# Altium PCB vga2.PcbDoc
Units mm, origin at the board's own origin, x right, y up, seen from the top; angles counter-clockwise.
Board outline 35.87 x 32.67 mm, 2 copper layers (Top Layer, Bottom Layer); 2 components, 17 nets, 37 pads, 0 vias.
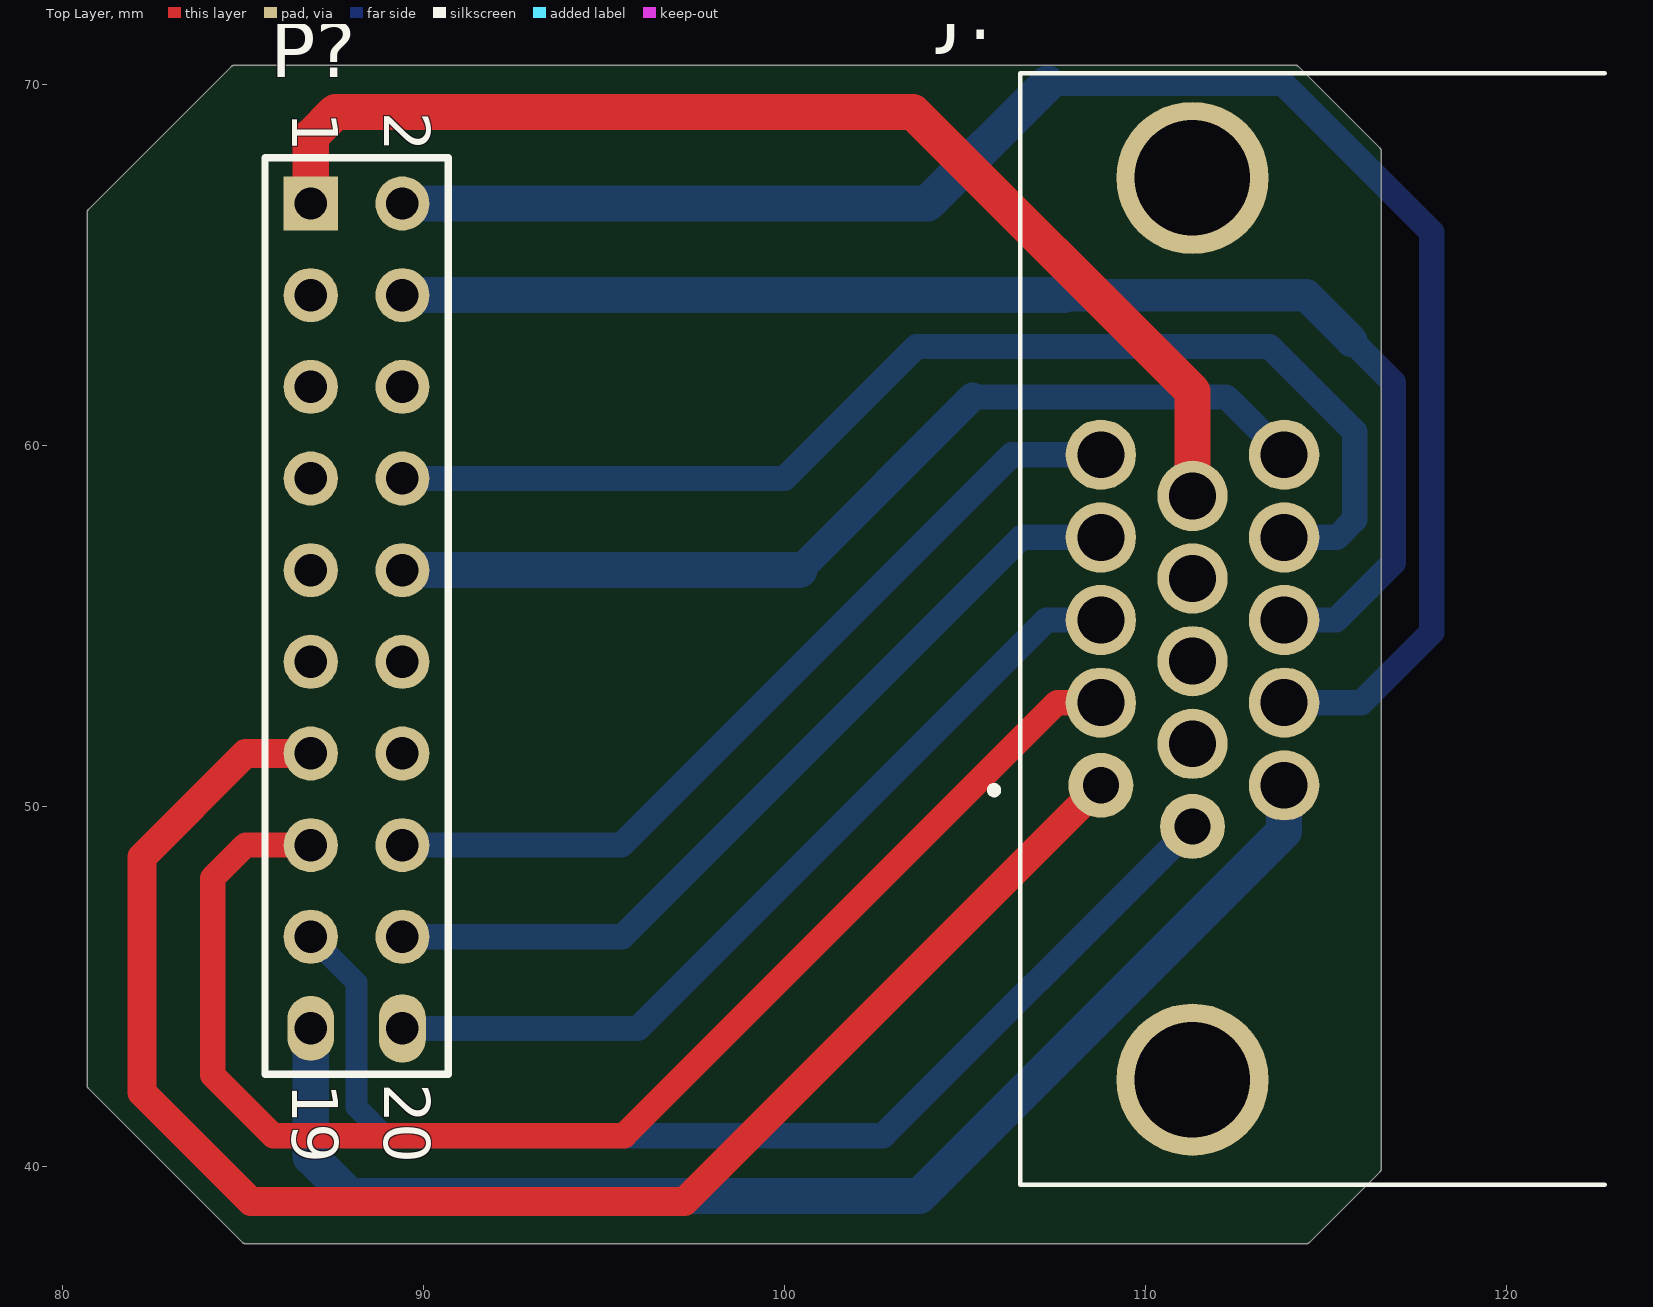
[diagram p0: Top Layer view]
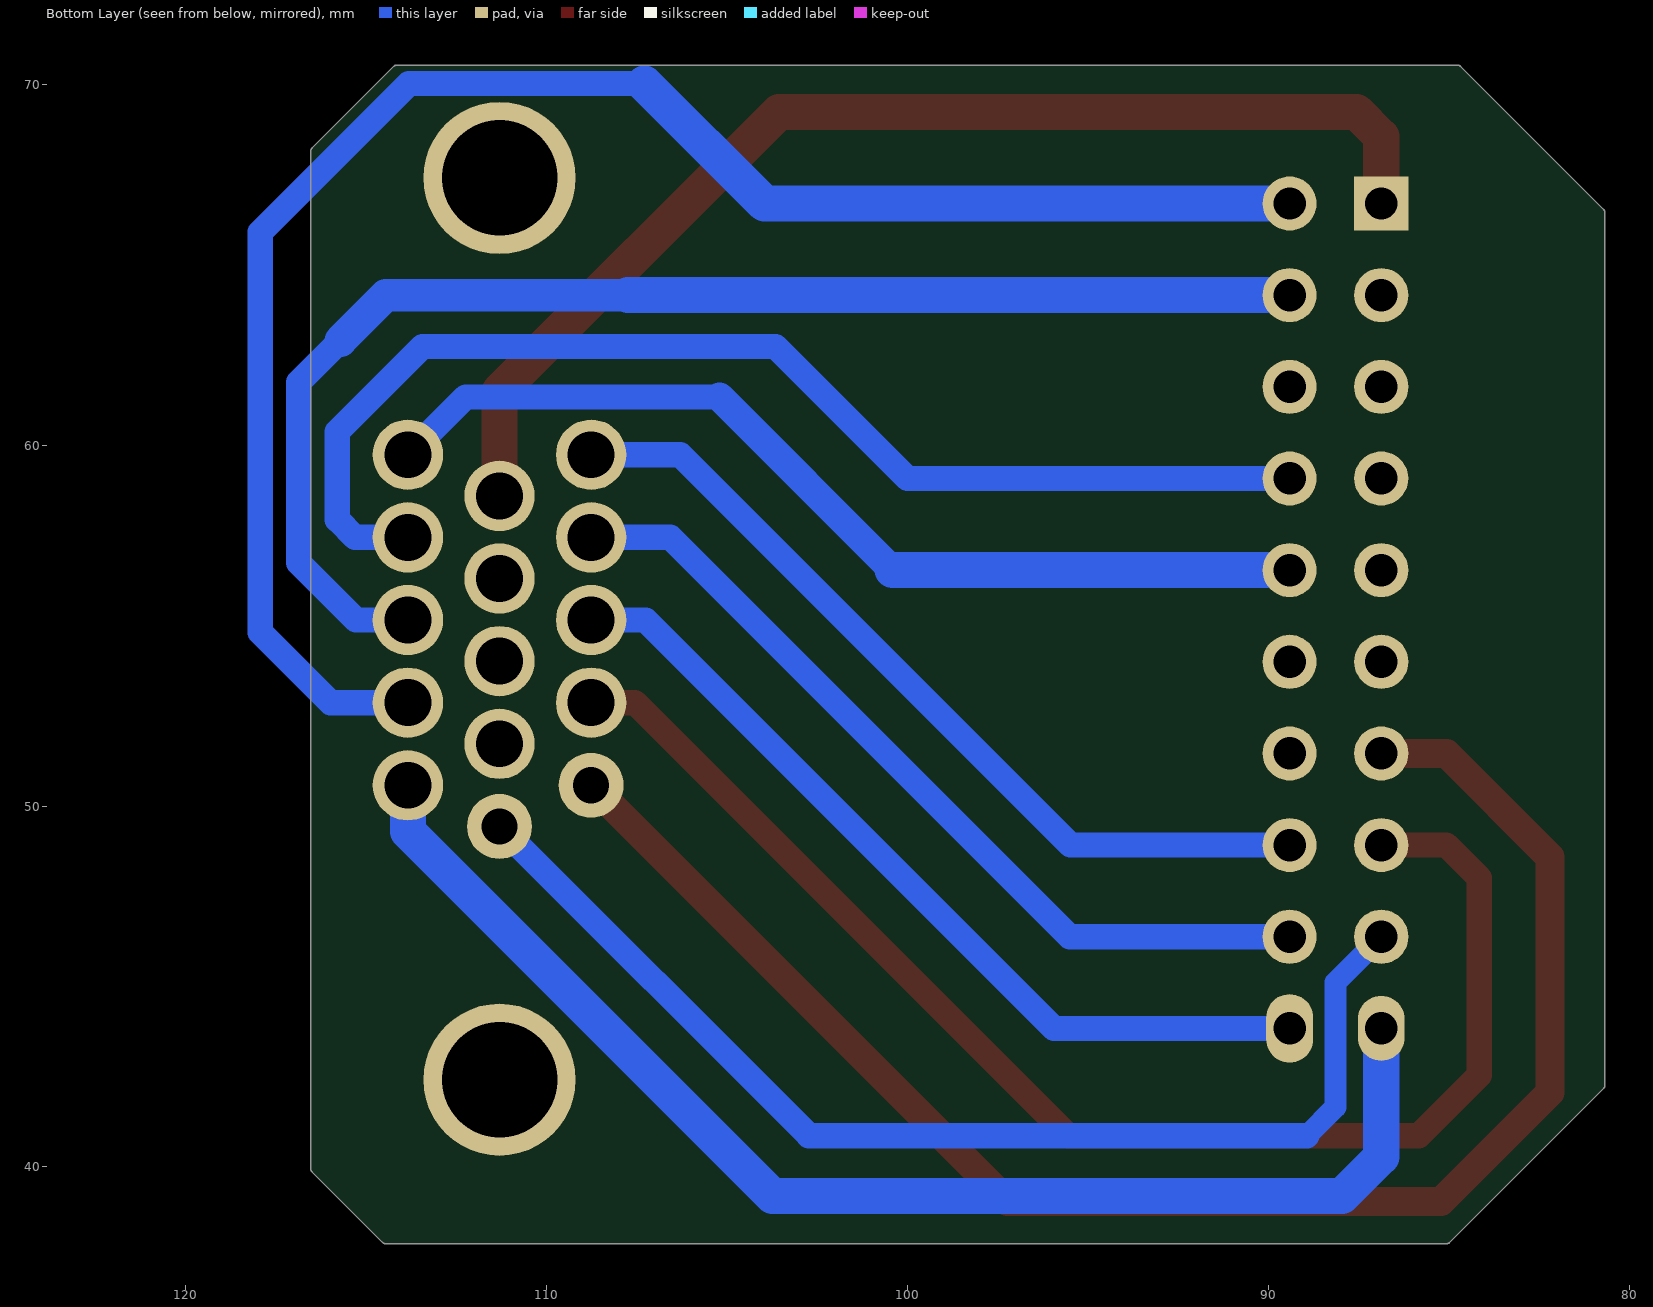
[diagram p1: Bottom Layer view, seen from below]

## Layer stack, top to bottom
Top Solder: solder mask 0.0102, Solder Resist, Dk 3.5
Top Layer: signal copper 0.0356
Dielectric 1: dielectric 0.32, FR-4, Dk 4.8
Bottom Layer: signal copper 0.0356
Bottom Solder: solder mask 0.0102, Solder Resist, Dk 3.5

## Board outline
80.708,42.175 cw(c80.797,42.266) 80.67,42.266 80.67,66.446 cw(c80.797,66.446) 80.708,66.537 80.707,66.536 84.67,70.499 84.669,70.498 cw(c84.76,70.409) 84.76,70.536 114.148,70.536 cw(c114.148,70.409) 114.238,70.498 114.238,70.499 116.498,68.238 116.498,68.239 cw(c116.408,68.148) 116.536,68.148 116.536,39.954 cw(c116.408,39.954) 116.498,39.864 114.542,37.908 114.543,37.909 cw(c114.452,37.998) 114.452,37.871 85.065,37.871 cw(c85.065,37.998) 84.974,37.909 84.975,37.908

## Design rules (kind name [scope] priority, off if disabled: settings)
Clearance [All] p1: gap=0.1 ignorepadtopadclearanceinfootprint=FALSE
PolygonConnect [All] p1: connectstyle=Relief reliefconductorwidth=0.254 reliefentries=4 polygonreliefangle="90 Angle" airgapwidth=0.254
RoutingVias [All] p1: holewidth=0.711 width=1.27 viastyle="Through Hole" minholewidth=0.711 minwidth=1.27 maxholewidth=0.711 maxwidth=1.27
SolderMaskExpansion [All] p1: expansion=0.102
Width [All] p1: maxlimit=1 minlimit=0.2 preferedwidth=0.4
30 further rules are at their usual default settings.

## Components (designator, comment, footprint, x,y, rotation, side; value= is the part's Value field where it differs from the comment)
J? "10090926-P154XLF" AMPHENOL_10090926-P154XLF 111.303,54.908 r90 top
P? "Header 10X2" HDR2X10 86.868,66.7 r270 top

## Footprints (in the part's own frame and the unit in brackets; to place one, negate y for a bottom-side part, rotate by r counter-clockwise, add the part's x,y. Pads: shape width x height; smd on the part's side, far side on the other; paste and mask are expansions set on the pad)
AMPHENOL_10090926-P154XLF [mm]
  round 1.8 hole 1: 1(-4.33,2.54) 6(-5.47,0)
  round 1.95 hole 1.3: 2(-2.04,2.54) 3(0.25,2.54) 4(2.54,2.54) 5(4.83,2.54) 7(-3.18,0) 8(-0.89,0) 9(1.4,0) 10(3.69,0) 11(-4.33,-2.54) 12(-2.04,-2.54) 13(0.25,-2.54) 14(2.54,-2.54) 15(4.83,-2.54)
  round 4.216 hole 3.2: S1(-12.49,0) S2(12.5,0)
  silkscreen extent -15.41,-11.43 15.41,5.6, body extent -15.41,-17.33 15.41,4.77, height 12.8
HDR2X10 [mm] "Connector; Header; 10x2 Position"
  rect 1.5x1.5 hole 0.9: 1(0,0)
  round 1.5 hole 0.9: 2(0,2.54) 3(2.54,0) 4(2.54,2.54) 5(5.08,0) 6(5.08,2.54) 7(7.62,0) 8(7.62,2.54) 9(10.16,0) 10(10.16,2.54) 11(12.7,0) 12(12.7,2.54) 13(15.24,0) 14(15.24,2.54) 15(17.78,0) 16(17.78,2.54) 17(20.32,0) 18(20.32,2.54)
  oval 1.8x1.3 hole 0.9: 19(22.86,0)
  oval 1.9x1.3 hole 0.9: 20(22.86,2.54)
  silkscreen extent -1.27,-1.27 24.13,3.81

## Part data
J?: "Conn High Density D-Sub PIN 15 POS 2.29mm Solder RA Thru-Hole 15 Terminal 1 Port", Package=None, Availability="In Stock", Check_prices=https://www.snapeda.com/parts/10090926-P154XLF/Amphenol/view-part/?ref=eda, MF=Amphenol, MP=10090926-P154XLF, Price=None, Purchase-URL=https://pricing.snapeda.com/search?q=10090926-P154XLF&ref=eda, SnapEDA_Link=https://www.snapeda.com/parts/10090926-P154XLF/Amphenol/view-part/?ref=snap
P?: "Header, 10-Pin, Dual row", LatestRevisionDate=17-Jul-2002, LatestRevisionNote="Re-released for DXP Platform.", Publisher="Altium Limited"

## Nets (pads, with @x,y where several pads share a name; then routed paths per layer and width w, separated by ;. In a path a pad name is that pad's centre, name@x,y a point inside that pad or via, vN(x,y) a via of type N, cw(c..) or ccw(c..) an arc to the next point about the centre after c; other vN are vias at no path point)
abort: J?.10 P?.1 | length 32.7
  Top Layer w1: P?.1 86.868,68.555 87.554,69.24 103.556,69.24 111.303,61.493 J?.10
d25: 
dir_x: J?.14 P?.8 | length 33.5
  Bottom Layer w0.7: P?.8 100,59.08 103.657,62.738 113.436,62.738 115.799,60.376 115.799,57.937 115.309,57.448 J?.14
dir_y: J?.15 P?.10 | length 27.1
  Bottom Layer w0.7: 105.207,61.341 112.24,61.341 J?.15
  Bottom Layer w0.8: 100.406,56.54 105.207,61.341
  Bottom Layer w1: P?.10 100.406,56.54
dir_z: P?.12
enable: P?.14
end_x: J?.5 P?.16 | length 23.8
  Bottom Layer w0.7: P?.16 95.479,48.92 106.296,59.738 J?.5
end_y: J?.4 P?.18 | length 23.9
  Bottom Layer w0.7: P?.18 95.504,46.38 106.572,57.448 J?.4
end_z: J?.3 P?.20 | length 24
  Bottom Layer w0.7: P?.20 95.936,43.84 107.253,55.158 J?.3
GND: J?.2 P?.15 | length 38.8
  Top Layer w0.7: P?.15 85.065,48.92 84.15,48.006 84.15,42.545 85.827,40.869 95.555,40.869 107.554,52.868 J?.2
hold: J?.1 P?.13 | length 45
  Top Layer w0.8: P?.13 85.065,51.46 82.194,48.59 82.194,42.062 85.217,39.04 97.225,39.04 J?.1
resume: P?.5
step_x: J?.12 P?.2 | length 47.6
  Bottom Layer w0.7: 107.29,70.028 113.817,70.028 117.932,65.913 117.932,54.813 115.987,52.868 J?.12
  Bottom Layer w1: P?.2 103.962,66.7 107.29,70.028
step_y: J?.13 P?.4 | length 37.1
  Bottom Layer w0.7: J?.13 115.28,55.158 116.865,56.744 116.865,61.747 115.71,62.903
  Bottom Layer w0.9: 107.747,64.16 114.452,64.16 115.71,62.903
  Bottom Layer w1: P?.4 107.747,64.16
step_z: P?.6
VCC: J?.6 P?.17 | length 32.3
  Bottom Layer w0.6: P?.17 88.138,45.11 88.138,41.656 88.925,40.869
  Bottom Layer w0.7: 88.925,40.869 102.733,40.869 J?.6
vin: J?.11 P?.19 | length 36.4
  Bottom Layer w1: P?.19 86.868,40.284 87.96,39.192 103.734,39.192 113.843,49.301 J?.11
pads on no net: J?.7 J?.8 J?.9 J?.S1 J?.S2 P?.3 P?.7 P?.9 P?.11

## Text inside footprints (layer, text, board x,y; h text height)
J?: Mechanical 13 "PCB EDGE" at 122.415,71.101 h1.27 r90
P?: Top Overlay "20" at 88.9,42.316 h1.27 r270; Top Overlay "19" at 86.36,42.316 h1.27 r270; Top Overlay "1" at 86.36,69.24 h1.27 r270; Top Overlay "2" at 88.9,69.24 h1.27 r270